# Altium PCB PCB1.PcbDoc
Units mil, origin at the board's own origin, x right, y up, seen from the top; angles counter-clockwise.
Board outline 960 x 1360 mil, 4 copper layers (Top Layer, Layer 1, Layer 2, Bottom Layer), stack 23.756 mil thick; 10 components, 7 nets, 25 pads, 5 vias.
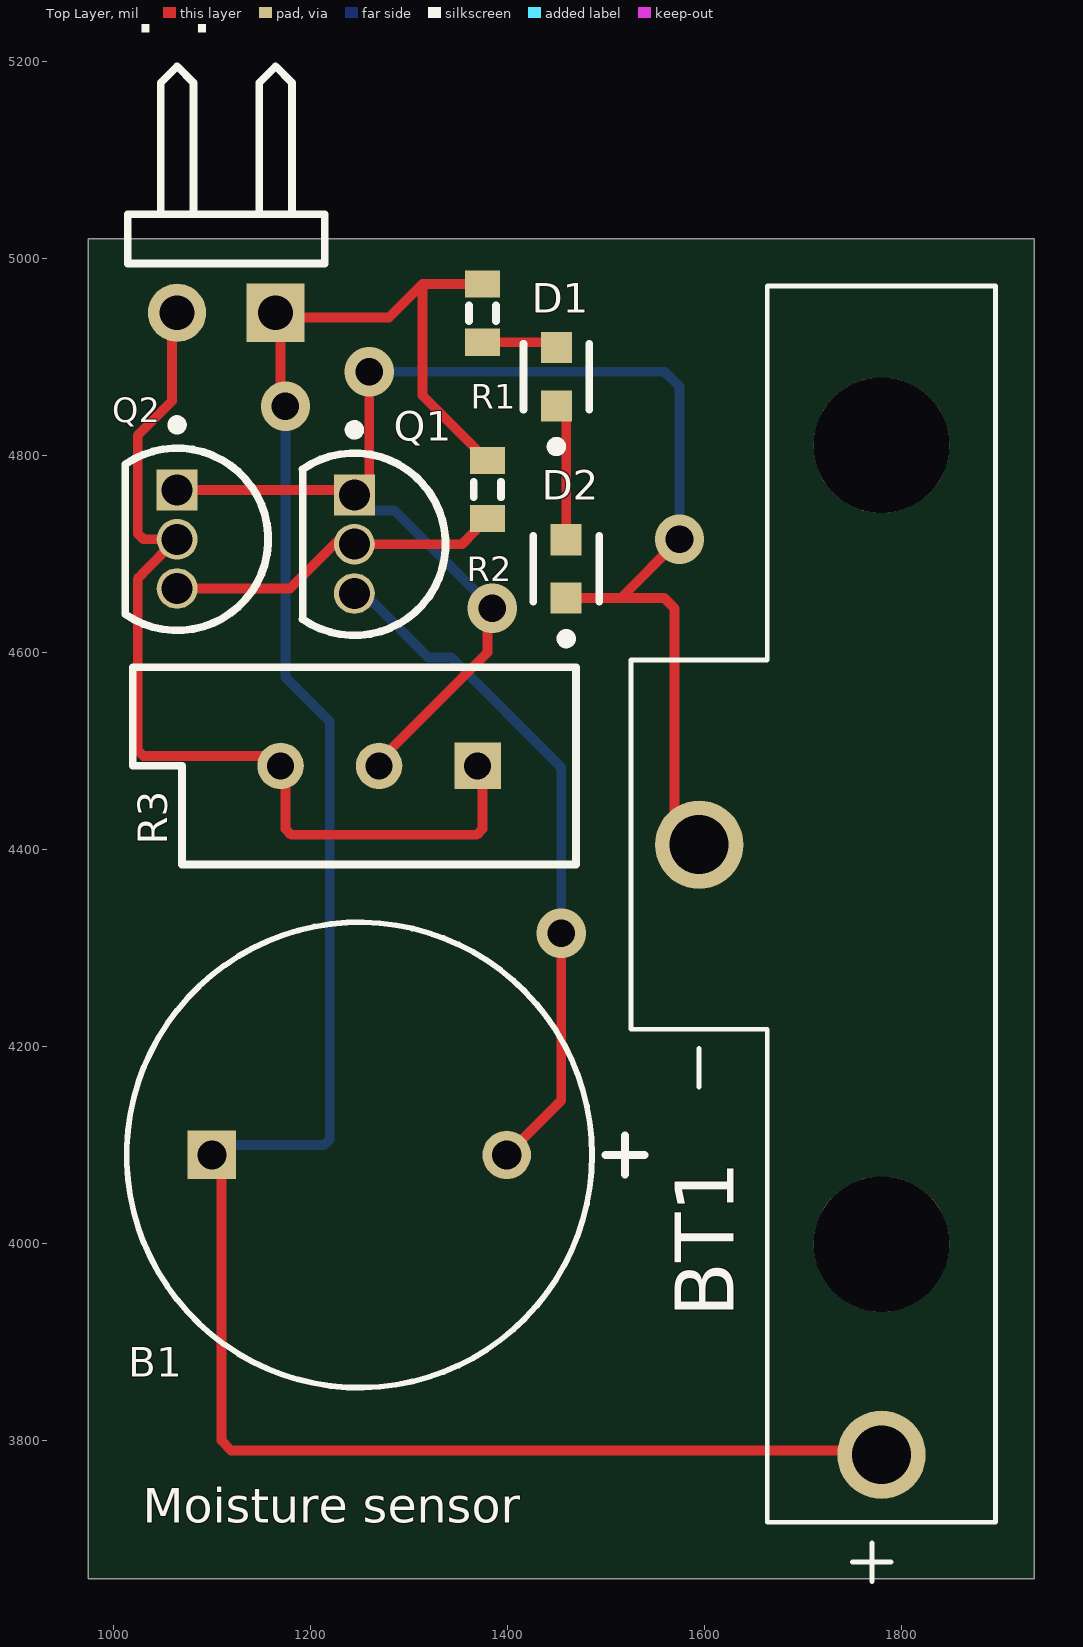
[diagram p0: Top Layer view]
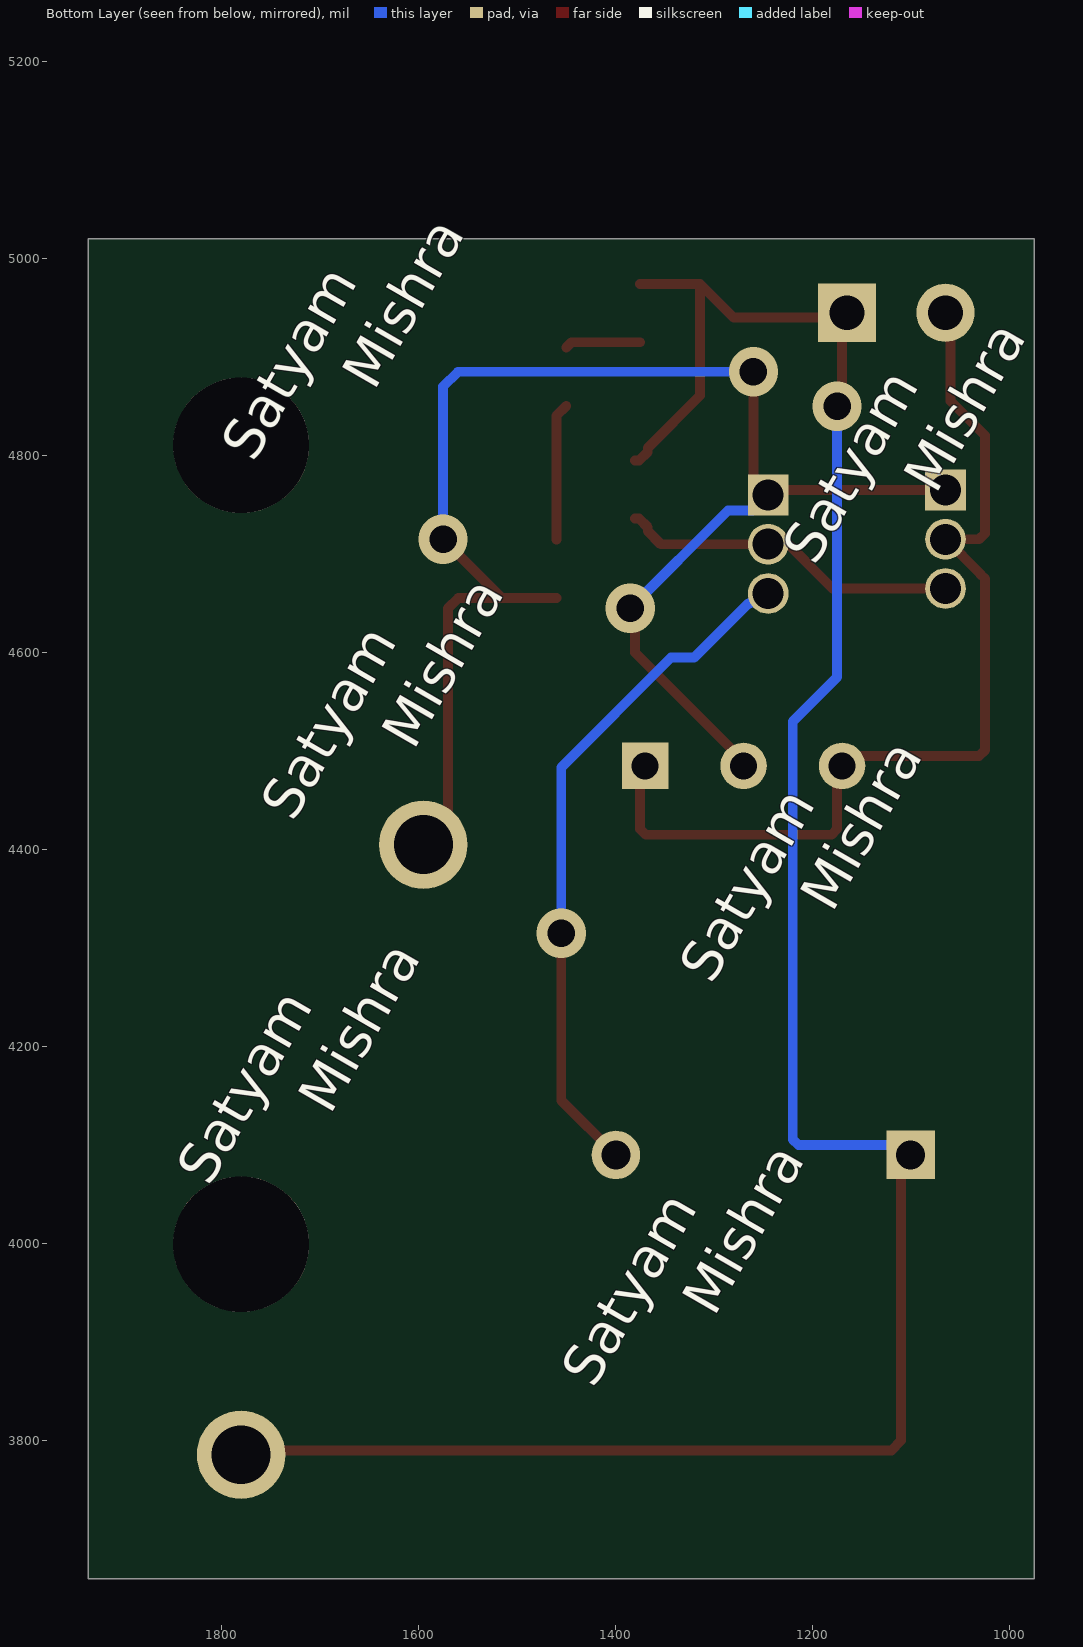
[diagram p1: Bottom Layer view, seen from below]
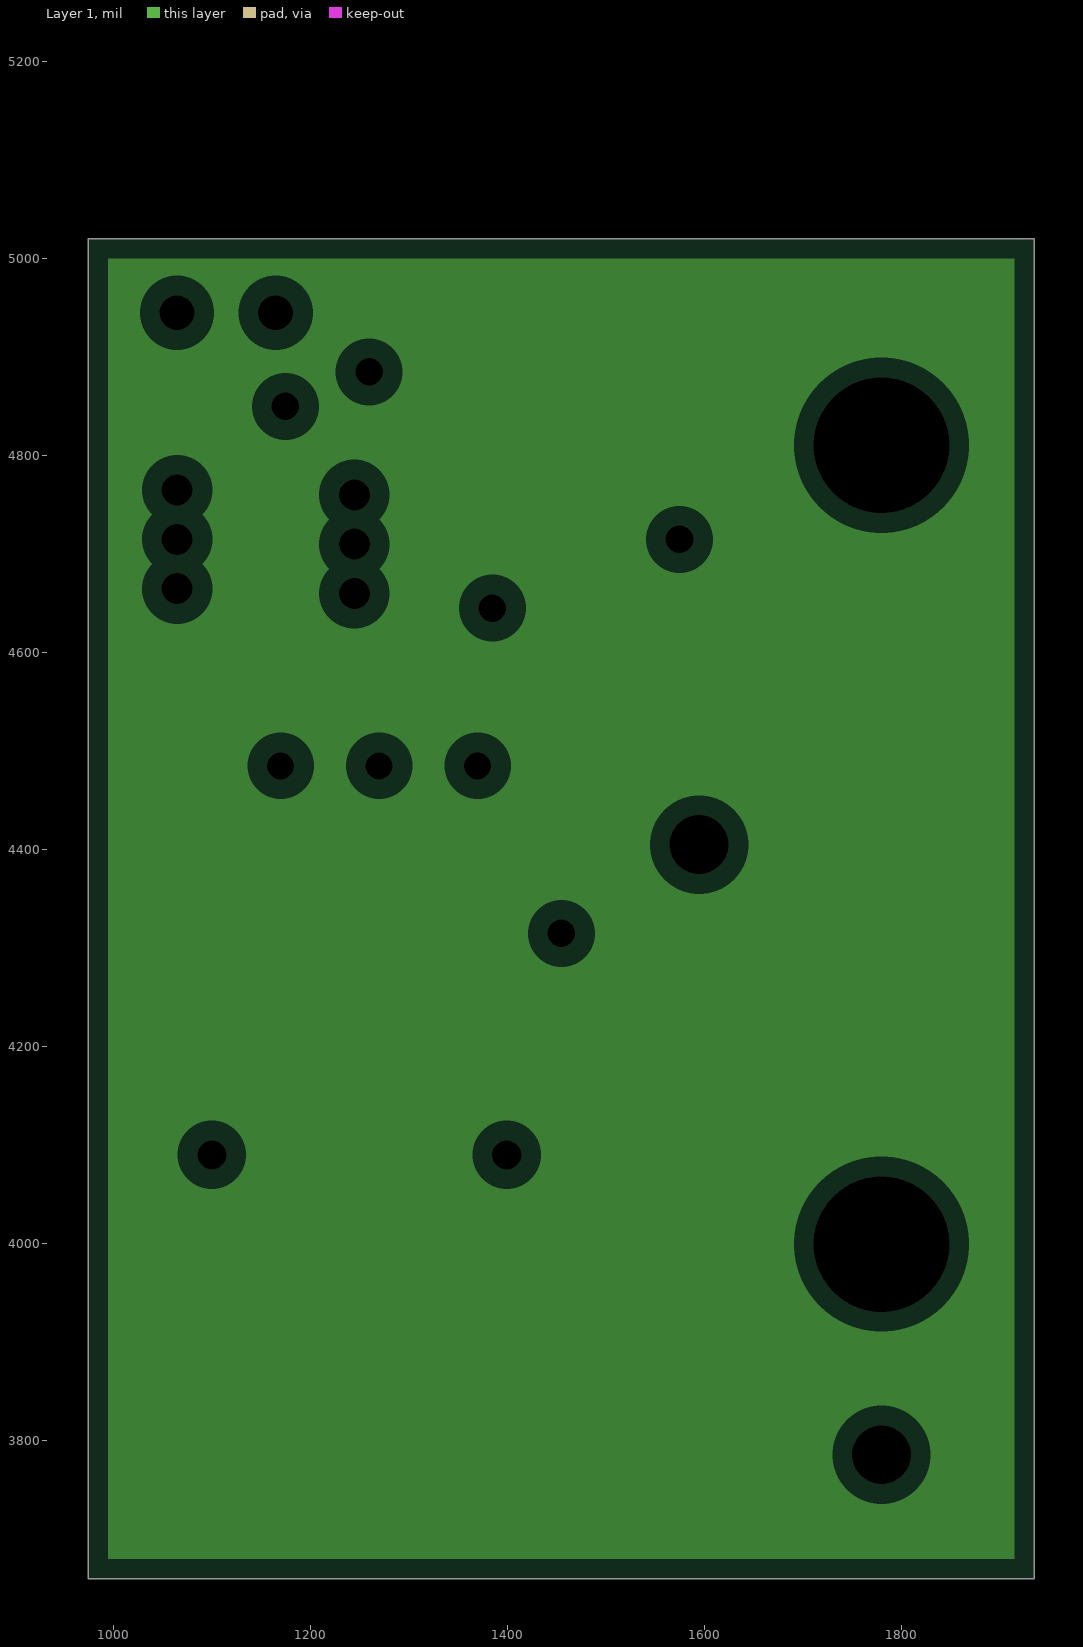
[diagram p2: Layer 1, clearances drawn from the general rule]
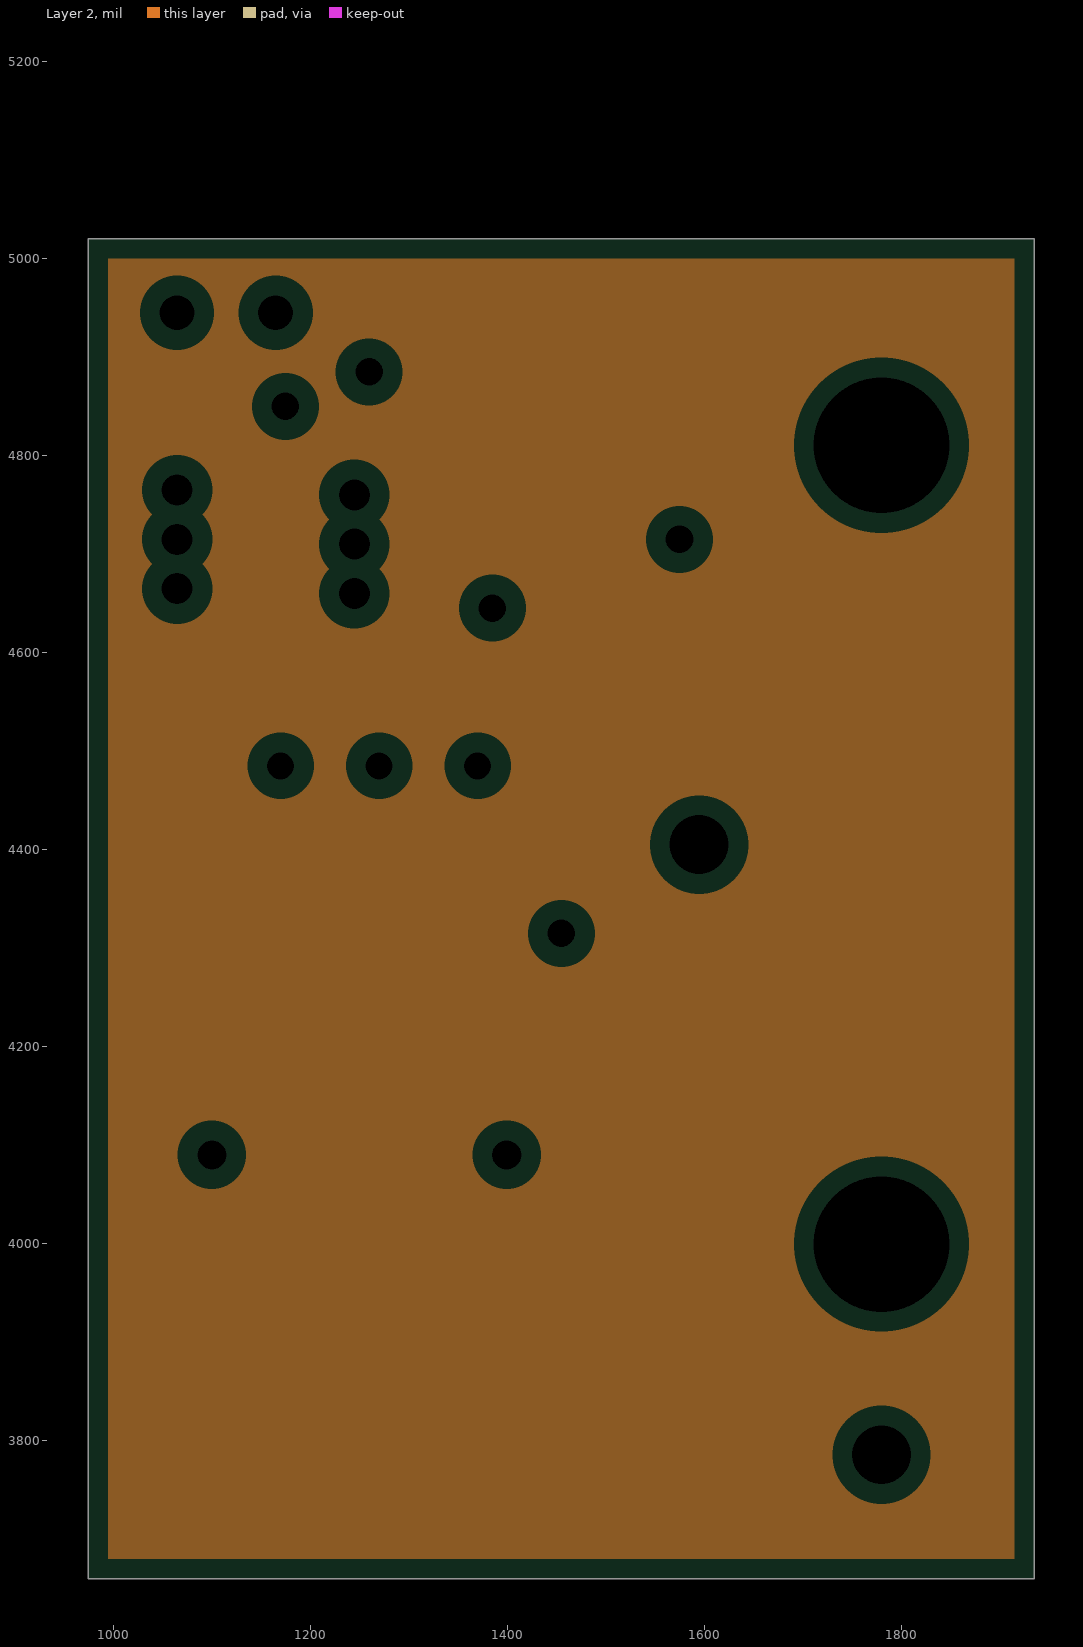
[diagram p3: Layer 2, clearances drawn from the general rule]

## Layer stack, top to bottom
Top Solder: solder mask 0.4, Solder Resist, Dk 3.5
Top Layer: signal copper 1.4
Dielectric 2: prepreg 2.8, PP-006, Dk 4.1
Layer 1: plane copper 1.378
Dielectric 1: dielectric 12.6, FR-4, Dk 4.8
Layer 2: plane copper 1.378
Dielectric 3: prepreg 2.8, PP-006, Dk 4.1
Bottom Layer: signal copper 1.4
Bottom Solder: solder mask 0.4, Solder Resist, Dk 3.5

## Board outline
975,5020 1935,5020 1935,3660 975,3660

## Design rules (kind name [scope] priority, off if disabled: settings)
Clearance [All] p1: gap=10 ignorepadtopadclearanceinfootprint=FALSE
PlaneClearance [All] p1: clearance=20
PlaneConnect [All] p1: planeconnectstyle=Relief reliefexpansion=20 reliefentries=4 reliefconductorwidth=10 reliefairgap=10
PolygonConnect [All] p1: connectstyle=Relief reliefconductorwidth=10 reliefentries=4 polygonreliefangle="90 Angle" airgapwidth=10
RoutingVias [All] p1: holewidth=28 width=50 viastyle="Through Hole" minholewidth=28 minwidth=50 maxholewidth=28 maxwidth=50
SolderMaskExpansion [All] p1: expansion=4 istentingtop=FALSE
Width [All] p1: maxlimit=10 minlimit=10 preferedwidth=10
28 further rules are at their usual default settings.

## Components (designator, comment, footprint, x,y, rotation, side; value= is the part's Value field where it differs from the comment)
B1 "MCKPX-G1203A-K4056" FP-MCKPX-G1203A-K4056-MFG 1250,4090 r0 top
BT1 "1068" BAT_1068 1780.04,4405 r270 top
D1 "LTST-C190GKT" FP-LTST-C190GKT-MFG 1450,4880 r90 top
D2 "LTST-C190GKT" FP-LTST-C190GKT-MFG 1460,4685 r90 top
P? "Header 2H" HDR1X2H 1165,4945 r180 top
Q1 "2N3904" ONSC-TO-92-3-29-11 1245,4710 r270 top
Q2 "2N3904" ONSC-TO-92-3-29-11 1065,4715 r270 top
R1 "Res3" J1-0603 1375,4944.53 r90 top value=100
R2 "Res3" J1-0603 1380,4765.47 r90 top value=10K
R3 "RPot" VR5 1270,4485 r180 top value=1K

## Footprints (in the part's own frame and the unit in brackets; to place one, negate y for a bottom-side part, rotate by r counter-clockwise, add the part's x,y. Pads: shape width x height; smd on the part's side, far side on the other; paste and mask are expansions set on the pad)
BAT_1068 [mm]
  round 2.28 hole 1.52: N(0,-4.7) P(15.73,0)
  round 3.5 hole 3.5 unplated: ""(-10.3,0) ""(10.3,0)
  silkscreen extent -14.41,-6.46 19,2.95
FP-LTST-C190GKT-MFG [mm]
  rect 0.8x0.8 smd paste+0 mask+0: 1(-0.75,0) 2(0.75,0)
  silkscreen extent -1.92,-0.85 0.85,0.85, body extent -1.25,-0.55 1.25,0.55, height 0.25
FP-MCKPX-G1203A-K4056-MFG [mm]
  rect 1.25x1.25 hole 0.75 paste-2539.97 mask+0: 1(-3.8,0)
  round 1.25 hole 0.75 paste-2539.97 mask+0: 2(3.8,0)
  silkscreen extent -6,-6 7.35,6, body extent -6.1,-6.1 6.1,6.1, height 0.25
HDR1X2H [mm] "Connector; Header; 2 Position; Right Angle"
  rect 1.5x1.5 hole 0.9: 1(0,0)
  round 1.5 hole 0.9: 2(2.54,0)
  silkscreen extent -1.27,-6.35 3.81,-1.27
J1-0603 [mm] "Chip Resistor, Body 1.6x0.8mm, IPC High Density"
  rect 0.7x0.9 smd: 1(-0.75,0) 2(0.75,0)
  silkscreen extent -0.2,-0.35 0.2,0.35, body extent -0.85,-0.48 0.85,0.48, height 0.9
ONSC-TO-92-3-29-11 [mm] "TO, 3-Leads, Body Dia 4.7mm, Pitch 1.27mm"
  rect 1.05x1.05 hole 0.8: 1(-1.27,0)
  round 1.05 hole 0.8: 2(0,0) 3(1.27,0)
  silkscreen extent -3.07,-1.34 2.35,2.35, body extent -2.35,-1.33 2.36,2.36, height 7.87
VR5 [mm] "Thru-Hole; 3 Leads"
  rect 1.2x1.2 hole 0.7: 1(-2.54,0)
  round 1.2 hole 0.7: 2(0,0) 3(2.54,0)
  silkscreen extent -5.08,-2.54 6.35,2.54

## Part data
B1: library part CMP-12433-000001-1, "MAGNETIC BUZZER AND TRANSDUCER - More Details", Current=30mA, Frequency=2300Hz, Manufacturer="Multicomp Pro", Max Supply Voltage=5V, Min Supply Voltage=2V, Operating Supply Voltage=3V, Package=0, Temperature="-20°C to +70°C", Temperature Range High=+70°C, Temperature Range Low=-20°C, Automotive=No, Category=Speak, ComponentLink2Description=Datasheet, ComponentLink2URL=http://www.farnell.com/datasheets/1498149.pdf?_ga=2.17855225.1157923166.1572356775-536200964.1569240579, Device Class L1=Electromechanical, Device Class L2="Audio Products", Device Class L3=Buzzers, Height=9.5mm, Lead Free=Yes, Manufacturer Part Number=MCKPX-G1203A-K4056, Octopart=https://octopart.com/mckpx-g1203a-k4056-multicomp-12157154, RoHS=TRUE, Standoff Height=0.5mm
BT1: library part CMP-007-000001-1, Package=None, Availability=Unavailable, Component Type=Standard, Design Item ID=1068, MP=1068, Pin Count=2, Price=None, Source=1068.SchLib
D1 D2: library part CMP-22017-000005-2, "LED GREEN CLEAR CHIP SMD", Case Code (Imperial)=0603, Case Code (Metric)=1608, Color=Green, Forward Current=30mA, Forward Voltage=2.1V, Lens Color=Colorless, Max Operating Temperature=85°C, Min Operating Temperature=-55°C, Package Quantity=1, Power Dissipation=100mW, Reverse Voltage=5V, Test Current=10mA, Voltage=2V, Case/Package=0603, Depth=0.8mm, Dominant Wavelength=569nm, Height=0.8mm, Illumination Color=Green, Lead Free="Lead Free", Length=1.6mm, Lens Style=Clear, Lens Transparency=Clear, Luminous Intensity=6mcd, Mount="Surface Mount", Number of Elements=1, Number of LEDs=1, Number of Pins=2, Packaging="Tape and Reel", Power Rating=100mW, Radiation Hardening=No, Viewing Angle=130°, Wavelength=565nm, Width=0.8mm
P?: "Header, 2-Pin, Right Angle", LatestRevisionDate=17-Jul-2002, LatestRevisionNote="Re-released for DXP Platform.", Publisher="Altium Limited"
Q1 Q2: library part CMP-2000-05562-1, "General Purpose Transistor, NPN Silicon, 200 mA, 60 V, -55 to 150 degC, 3-Pin TO-92, RoHS, Bulk", Collector- Base Voltage VCBO=60V, Collector- Emitter Voltage VCEO Max=40V, Collector-Emitter Saturation Voltage=0.3V, Emitter- Base Voltage VEBO=6V, Manufacturer=ONSemiconductor, Maximum DC Collector Current=0.2A, Maximum Operating Temperature=+150C, Maximum Power Dissipation=625mW, Minimum Operating Temperature=-65C, Package / Case=TO-92-3(TO-226), Package Description="3-Pin Transistor Outline, Body 4.825 x 3.685 mm, Pitch 1.27 mm", Package Reference=TO-92-3-29-11, Brand=ONSemiconductor, Configuration=Single, Datasheet URL=https://datasheet.ciiva.com/4725/2n3903-d-285841-4725808.pdf, Datasheet Version="Rev. 8, 08/2012", DC Collector/Base Gain hfe Min=60, Factory Pack Quantity=5000, Gain Bandwidth Product fT=270MHz, Manufacturer URL=http://www.onsemi.com/, Mounting Style=ThroughHole, Mounting Technology=ThroughHole, Packaging=Bulk, Product Category=BipolarTransistors-BJT, RoHS=Details, Transistor Polarity=NPN
R1 R2: "Resistor", LatestRevisionDate=29-May-2009, LatestRevisionNote="IPC-7351 Footprint Added.", PackageDescription="Chip Resistor", PackageReference=J1-0603, Published=8-Jun-2000, Publisher="Altium Limited"
R3: "Potentiometer", LatestRevisionDate=17-Jul-2002, LatestRevisionNote="Re-released for DXP Platform.", PackageDescription="Variable Resistor, Thru-Hole; 3 Leads", PackageReference=VR5, Published=8-Jun-2000, Publisher="Altium Limited", Set Position=0.5, Sim Note="Enter the Resistance value and the set point into parameter fields."

## Via types
v1: diameter 50, hole 28, Top Layer to Bottom Layer, 5 vias

## Nets (pads, with @x,y where several pads share a name; then routed paths per layer and width w, separated by ;. In a path a pad name is that pad's centre, name@x,y a point inside that pad or via, vN(x,y) a via of type N, cw(c..) or ccw(c..) an arc to the next point about the centre after c; other vN are vias at no path point)
NetB1_1: B1.1 BT1.P P?.1 R1.2 R2.2 | length 2363
  Top Layer w10: B1.1@1110.39,4100 1110,4099.61 1110,3800 1119.8,3790.2 BT1.P@1760,3790.2 ; v1(1175,4850) 1170,4855 1170,4930 1160,4940 1280,4940 1314.06,4974.06 ; R1.2 1314.06,4974.06 ; R2.2 1376.06,4795 1367.28,4803.78 1367.28,4807.72 1314.06,4860.94 1314.06,4974.06
  Bottom Layer w10: B1.1@1110.39,4100 1214.14,4100 1220,4105.86 1220,4530 1175,4575 v1(1175,4850)
NetB1_2: B1.2 Q1.3 | length 699.5
  Top Layer w10: B1.2 1455,4145.39 v1(1455,4315)
  Bottom Layer w10: Q1.3 1253.48,4660 1263.7,4649.78 1265.22,4649.78 1320,4595 1343.46,4595 1455,4483.46 v1(1455,4315)
NetBT1_N: BT1.N D2.1 Q1.1 Q2.1 R3.2 | length 1608.8
  Top Layer w10: Q2.1 1240,4765 Q1.1 1260,4775 v1(1260,4885) ; R3.2@1275,4495 1380,4600 1380,4640 v1(1385,4645) ; D2.1 1515.47,4655.47 ; BT1.N@1574.96,4409.49 1570,4414.45 1570,4645 1559.53,4655.47 1515.47,4655.47 ; v1(1575,4715) 1515.47,4655.47
  Bottom Layer w10: Q1.1 1260.67,4744.33 1285.67,4744.33 v1(1385,4645) ; v1(1260,4885) 1560,4885 1575,4870 v1(1575,4715)
NetD1_1: D1.1 D2.2 | length 140.1
  Top Layer w10: D1.1 1460,4840.47 D2.2
NetD1_2: D1.2 R1.1 | length 77.3
  Top Layer w10: R1.1 1444.53,4915 D1.2
NetP?_2: P?.2 Q2.2 R3.1 R3.3 | length 1012.6
  Top Layer w10: P?.2@1060,4940 1060,4855.26 1025,4820.26 1025,4720.86 1030.86,4715 Q2.2 1064.56,4715 1029.33,4679.77 1029.33,4679.33 1025,4675 1025,4500.86 1030.86,4495 1175,4495 1175,4420.86 1180.86,4415 1369.14,4415 1375,4420.86 R3.1@1375,4495
NetQ1_2: Q1.2 Q2.3 R2.1 | length 340.7
  Top Layer w10: Q2.3 1179.56,4665 Q1.2@1234.78,4720.22 ; Q1.2 1354.06,4710 1367.28,4723.23 1367.28,4727.17 1376.06,4735.94 R2.1
pads on no net: BT1.

## Polygon pours and split planes (outlines as drawn)
no net on Layer 1 (split plane): 1914.9,3680.1 995.1,3680.1 995.1,4999.9 1914.9,4999.9
no net on Layer 2 (split plane): 1914.9,3680.1 995.1,3680.1 995.1,4999.9 1914.9,4999.9

## Silkscreen, mask and mechanical layers (free items; w line width, h text height)
Top Overlay:
  text "Moisture sensor" at 1030,3705 h60
Bottom Overlay:
  text "Satyam /        Mishra" at 1695,4750 h70 r300
  text "Satyam /        Mishra" at 1125,4645 h70 r300
  text "Satyam /        Mishra" at 1655,4385 h70 r300
  text "Satyam /        Mishra" at 1230,4220 h70 r300
  text "Satyam /        Mishra" at 1740,4015 h70 r300
  text "Satyam /        Mishra" at 1350,3810 h70 r300